# Altium PCB Module Board.PcbDoc (part 2 of 6)
Units mm, origin at the board's own origin, x right, y up, seen from the top; angles counter-clockwise.
Board outline 300 x 80 mm, 4 copper layers (Top Layer, GND1-Layer, GND2-Layer, Bottom Layer), stack 1.586 mm thick; 425 components, 248 nets, 1063 pads, 936 vias.
Unrouted connection lines stored in the file: 3.
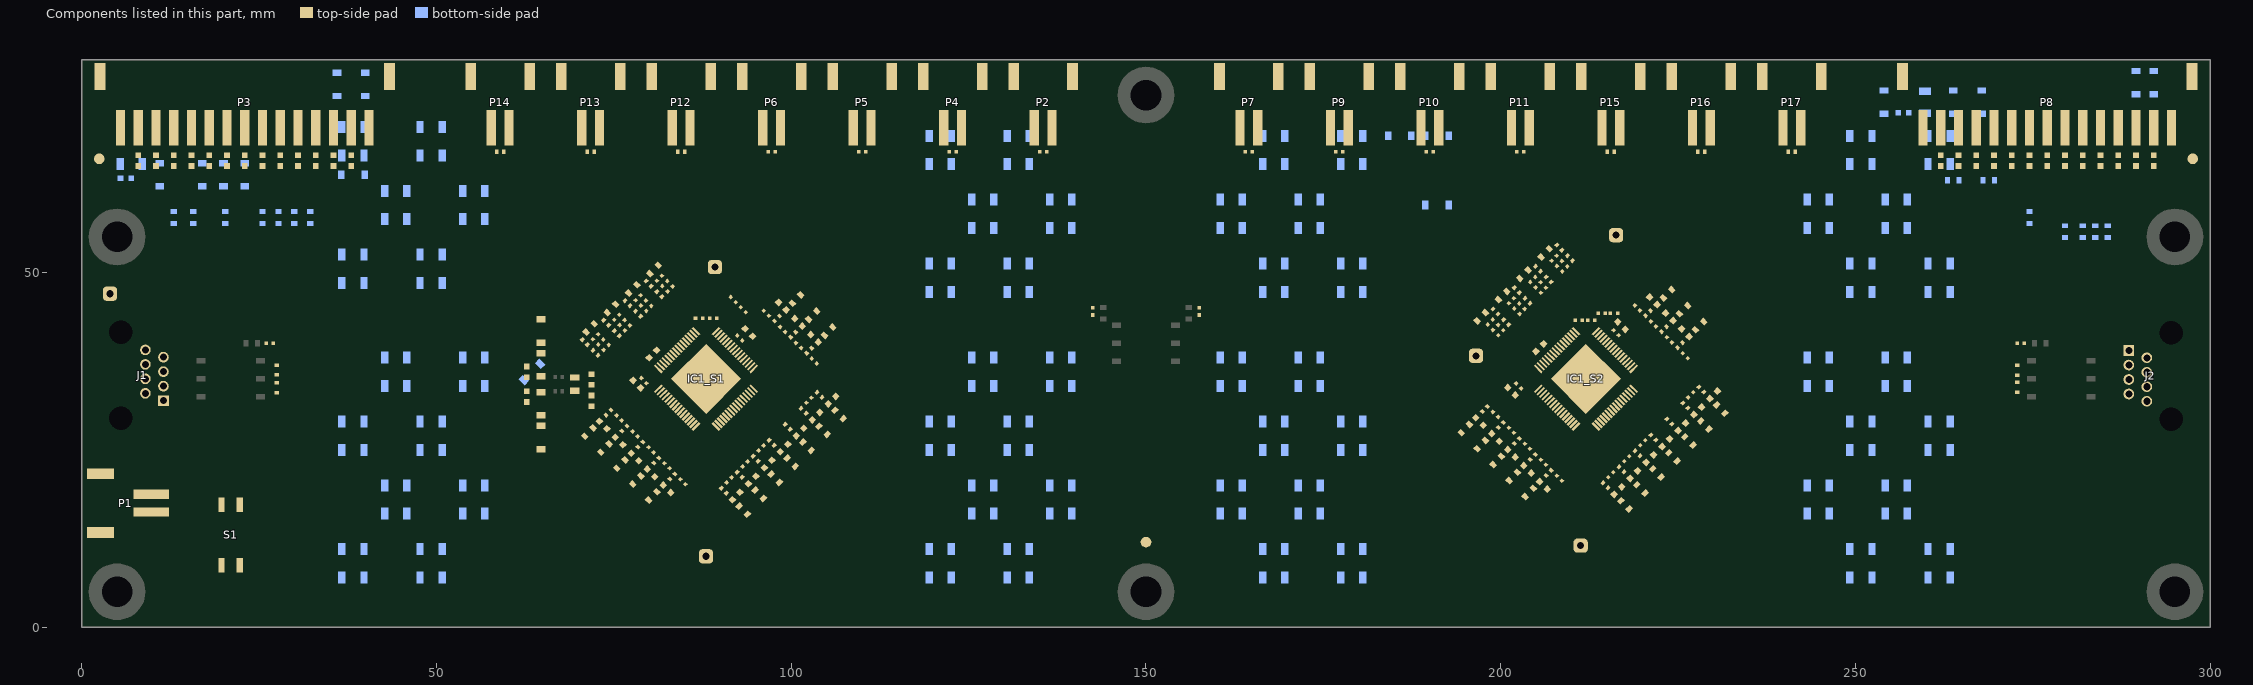
[diagram p4: the components of this part, seen from the top]

## Design rules (kind name [scope] priority, off if disabled: settings) (continued)
Clearance "Schematic Clearance Constraint_16" [InNet('NetC47_S1_2')] p149: gap=0.5 ignorepadtopadclearanceinfootprint=TRUE except(0.15: Arc-Text Arc-Hole Track-Text Track-Hole SMDPad-Text SMDPad-Hole THPad-Text THPad-Hole Via-Text Via-Hole Fill-Text Fill-Hole Poly-Text Poly-Hole Region-Text Region-Hole Text-Text Text-Hole)
Clearance "Schematic Clearance Constraint_15" [InNet('NetC49_S1_2')] p150: gap=0.5 ignorepadtopadclearanceinfootprint=TRUE except(0.15: Arc-Text Arc-Hole Track-Text Track-Hole SMDPad-Text SMDPad-Hole THPad-Text THPad-Hole Via-Text Via-Hole Fill-Text Fill-Hole Poly-Text Poly-Hole Region-Text Region-Hole Text-Text Text-Hole)
Clearance "Schematic Clearance Constraint_14" [InNet('NetC52_S1_2')] p151: gap=0.5 ignorepadtopadclearanceinfootprint=TRUE except(0.15: Arc-Text Arc-Hole Track-Text Track-Hole SMDPad-Text SMDPad-Hole THPad-Text THPad-Hole Via-Text Via-Hole Fill-Text Fill-Hole Poly-Text Poly-Hole Region-Text Region-Hole Text-Text Text-Hole)
Clearance "Schematic Clearance Constraint_13" [InNet('NetC55_S1_2')] p152: gap=0.5 ignorepadtopadclearanceinfootprint=TRUE except(0.15: Arc-Text Arc-Hole Track-Text Track-Hole SMDPad-Text SMDPad-Hole THPad-Text THPad-Hole Via-Text Via-Hole Fill-Text Fill-Hole Poly-Text Poly-Hole Region-Text Region-Hole Text-Text Text-Hole)
Clearance "Schematic Clearance Constraint_12" [InNet('NetC58_S1_2')] p153: gap=0.5 ignorepadtopadclearanceinfootprint=TRUE except(0.15: Arc-Text Arc-Hole Track-Text Track-Hole SMDPad-Text SMDPad-Hole THPad-Text THPad-Hole Via-Text Via-Hole Fill-Text Fill-Hole Poly-Text Poly-Hole Region-Text Region-Hole Text-Text Text-Hole)
Clearance "Schematic Clearance Constraint_11" [InNet('NetC63_S1_2')] p154: gap=0.5 ignorepadtopadclearanceinfootprint=TRUE except(0.15: Arc-Text Arc-Hole Track-Text Track-Hole SMDPad-Text SMDPad-Hole THPad-Text THPad-Hole Via-Text Via-Hole Fill-Text Fill-Hole Poly-Text Poly-Hole Region-Text Region-Hole Text-Text Text-Hole)
Clearance "Schematic Clearance Constraint_10" [InNet('NetR57_RB_C21_2')] p155: gap=0.5 ignorepadtopadclearanceinfootprint=TRUE except(0.15: Arc-Text Arc-Hole Track-Text Track-Hole SMDPad-Text SMDPad-Hole THPad-Text THPad-Hole Via-Text Via-Hole Fill-Text Fill-Hole Poly-Text Poly-Hole Region-Text Region-Hole Text-Text Text-Hole)
Clearance "Schematic Clearance Constraint_9" [InNet('NetR57_RB_C101_2')] p156: gap=0.5 ignorepadtopadclearanceinfootprint=TRUE except(0.15: Arc-Text Arc-Hole Track-Text Track-Hole SMDPad-Text SMDPad-Hole THPad-Text THPad-Hole Via-Text Via-Hole Fill-Text Fill-Hole Poly-Text Poly-Hole Region-Text Region-Hole Text-Text Text-Hole)
Clearance "Schematic Clearance Constraint_8" [InNet('NetR57_RB_C31_2')] p157: gap=0.5 ignorepadtopadclearanceinfootprint=TRUE except(0.15: Arc-Text Arc-Hole Track-Text Track-Hole SMDPad-Text SMDPad-Hole THPad-Text THPad-Hole Via-Text Via-Hole Fill-Text Fill-Hole Poly-Text Poly-Hole Region-Text Region-Hole Text-Text Text-Hole)
Clearance "Schematic Clearance Constraint_7" [InNet('NetR57_RB_C41_2')] p158: gap=0.5 ignorepadtopadclearanceinfootprint=TRUE except(0.15: Arc-Text Arc-Hole Track-Text Track-Hole SMDPad-Text SMDPad-Hole THPad-Text THPad-Hole Via-Text Via-Hole Fill-Text Fill-Hole Poly-Text Poly-Hole Region-Text Region-Hole Text-Text Text-Hole)
Clearance "Schematic Clearance Constraint_6" [InNet('NetR57_RB_C51_2')] p159: gap=0.5 ignorepadtopadclearanceinfootprint=TRUE except(0.15: Arc-Text Arc-Hole Track-Text Track-Hole SMDPad-Text SMDPad-Hole THPad-Text THPad-Hole Via-Text Via-Hole Fill-Text Fill-Hole Poly-Text Poly-Hole Region-Text Region-Hole Text-Text Text-Hole)
Clearance "Schematic Clearance Constraint_5" [InNet('NetR57_RB_C61_2')] p160: gap=0.5 ignorepadtopadclearanceinfootprint=TRUE except(0.15: Arc-Text Arc-Hole Track-Text Track-Hole SMDPad-Text SMDPad-Hole THPad-Text THPad-Hole Via-Text Via-Hole Fill-Text Fill-Hole Poly-Text Poly-Hole Region-Text Region-Hole Text-Text Text-Hole)
Clearance "Schematic Clearance Constraint_4" [InNet('NetR57_RB_C71_2')] p161: gap=0.5 ignorepadtopadclearanceinfootprint=TRUE except(0.15: Arc-Text Arc-Hole Track-Text Track-Hole SMDPad-Text SMDPad-Hole THPad-Text THPad-Hole Via-Text Via-Hole Fill-Text Fill-Hole Poly-Text Poly-Hole Region-Text Region-Hole Text-Text Text-Hole)
Clearance "Schematic Clearance Constraint_3" [InNet('NetR57_RB_C81_2')] p162: gap=0.5 ignorepadtopadclearanceinfootprint=TRUE except(0.15: Arc-Text Arc-Hole Track-Text Track-Hole SMDPad-Text SMDPad-Hole THPad-Text THPad-Hole Via-Text Via-Hole Fill-Text Fill-Hole Poly-Text Poly-Hole Region-Text Region-Hole Text-Text Text-Hole)
Clearance "Schematic Clearance Constraint_2" [InNet('NetR57_RB_C91_2')] p163: gap=0.5 ignorepadtopadclearanceinfootprint=TRUE except(0.15: Arc-Text Arc-Hole Track-Text Track-Hole SMDPad-Text SMDPad-Hole THPad-Text THPad-Hole Via-Text Via-Hole Fill-Text Fill-Hole Poly-Text Poly-Hole Region-Text Region-Hole Text-Text Text-Hole)
Clearance "Schematic Clearance Constraint_1" [InNet('CB_1_S2')] p164: gap=0.5 ignorepadtopadclearanceinfootprint=TRUE except(0.15: Arc-Text Arc-Hole Track-Text Track-Hole SMDPad-Text SMDPad-Hole THPad-Text THPad-Hole Via-Text Via-Hole Fill-Text Fill-Hole Poly-Text Poly-Hole Region-Text Region-Hole Text-Text Text-Hole)
Clearance [All] p165: gap=0.15 ignorepadtopadclearanceinfootprint=TRUE
ComponentClearance ComponentClearance_netTie0.4 [HasFootprint('NETTIE_0.4mm')] p1: gap=0.15 collisioncheckmode=3 verticalgap=0.15 showdistances=FALSE
ComponentClearance ComponentClearance_netTie0.2 [HasFootprint('NETTIE_0.2mm')] p2: gap=0.15 collisioncheckmode=3 verticalgap=0.15 showdistances=FALSE
ComponentClearance ComponentClearance_0402 [HasFootprint('FP-RT0402-0_35-MFG')] p3: gap=0.15 collisioncheckmode=3 verticalgap=0.15 showdistances=FALSE
ComponentClearance ComponentClearance_0402cap [HasFootprint('WCAP-CSGP_0402_L1W0.5H0.5')] p4: gap=0.15 collisioncheckmode=3 verticalgap=0.15 showdistances=FALSE
ComponentClearance ComponentClearance_default [All] p5: gap=0.25 collisioncheckmode=3 verticalgap=0.25 showdistances=FALSE
DiffPairsRouting USB90 [InDifferentialPairClass('USB90')] p1: maxlimit=0.15 minlimit=0.15 mostfreqgap=0.15 toplayer_minwidth=0.27 toplayer_maxwidth=0.27 toplayer_prefwidth=0.27 bottomlayer_minwidth=0.27 bottomlayer_maxwidth=0.27 bottomlayer_prefwidth=0.27 impedanceprofiledriven=TRUE impedanceprofileid={DC1DE9DE-C0C6-4966-BB51-316A41783ADE} impedanceprofilevalue=90.000000 maxuncoupledlength=12.7
DiffPairsRouting TPL100 [InDifferentialPairClass('TPL100')] p2: maxlimit=0.15 minlimit=0.15 mostfreqgap=0.15 toplayer_minwidth=0.2 toplayer_maxwidth=0.2 toplayer_prefwidth=0.2 bottomlayer_minwidth=0.2 bottomlayer_maxwidth=0.2 bottomlayer_prefwidth=0.2 impedanceprofiledriven=TRUE impedanceprofileid={703E7EA8-AA8D-435B-A468-5B85F633AE72} impedanceprofilevalue=100.000000 maxuncoupledlength=12.7
DiffPairsRouting CAN120 [InDifferentialPairClass('CAN120')] p3: maxlimit=0.3 minlimit=0.3 mostfreqgap=0.3 toplayer_minwidth=0.19 toplayer_maxwidth=0.19 toplayer_prefwidth=0.19 bottomlayer_minwidth=0.19 bottomlayer_maxwidth=0.19 bottomlayer_prefwidth=0.19 impedanceprofiledriven=TRUE impedanceprofileid={871B5821-40E8-4773-8F16-608F7B2A7119} impedanceprofilevalue=120.000000 maxuncoupledlength=12.7
Height [All] p1: minheight=0 maxheight=999 prefheight=1
HoleSize HoleSize-PTH [All] p1: absolutevalues=TRUE maxlimit=8 minlimit=0.25 maxpercent=80.000 minpercent=20.000
HoleToHoleClearance [All] p1: gap=0.35 allowstackedmicrovias=TRUE
MatchedLengths DiffPair_USB90MatchedLengths [InDifferentialPairClass('USB90')] p1: tolerance=25.4 checknetsindiffpair=FALSE checkdiffpairvsdiffpair=TRUE checkxsignals=TRUE checkothers=TRUE
MatchedLengths DiffPair_TPL100MatchedLengths [InDifferentialPairClass('TPL100')] p2: tolerance=25.4 checknetsindiffpair=TRUE checkdiffpairvsdiffpair=FALSE checkxsignals=FALSE checkothers=FALSE
MatchedLengths DiffPair_CAN120MatchedLengths [InDifferentialPairClass('CAN120')] p3: tolerance=25.4 checknetsindiffpair=FALSE checkdiffpairvsdiffpair=TRUE checkxsignals=TRUE checkothers=TRUE
MinimumAnnularRing "MinimumAnnularRing - Via" [IsVia] p1: minimumring=0.07
MinimumAnnularRing "MinimumAnnularRing - PTH" [Not IsVia] p2: minimumring=0.2
MinimumSolderMaskSliver [All] p1: minsoldermaskwidth=0.1
PlaneClearance PlaneClearance-IPI [All] p1: clearance=0.25
PlaneConnect [All] p1: planeconnectstyle=Relief reliefexpansion=0.175 reliefentries=4 reliefconductorwidth=0.3 reliefairgap=0.25
PolygonConnect PolygonConnect-xTW [InNet('+12')] p1: thpad.connectstyle=Relief thpad.reliefconductorwidth=0.5 thpad.reliefentries=4 thpad.polygonreliefangle="90 Angle" thpad.airgapwidth=0.2 smdpad.connectstyle=Relief smdpad.reliefconductorwidth=0.5 smdpad.reliefentries=4 smdpad.polygonreliefangle="90 Angle" smdpad.airgapwidth=0.2 via.connectstyle=Direct via.reliefconductorwidth=0.2 via.reliefentries=4 via.polygonreliefangle="90 Angle" via.airgapwidth=0.2
PolygonConnect PolygonConnect-xTW_1 [All] p2: thpad.connectstyle=Relief thpad.reliefconductorwidth=0.2 thpad.reliefentries=4 thpad.polygonreliefangle="90 Angle" thpad.airgapwidth=0.2 smdpad.connectstyle=Relief smdpad.reliefconductorwidth=0.2 smdpad.reliefentries=4 smdpad.polygonreliefangle="90 Angle" smdpad.airgapwidth=0.2 via.connectstyle=Direct via.reliefconductorwidth=0.2 via.reliefentries=4 via.polygonreliefangle="90 Angle" via.airgapwidth=0.2
RoomDefinition MC33771C_S2_CLEARANCE [InComponent('IC1_S2')] p1: confinementstyle=ConfineIn formatcopy=TRUE lockcomponents=TRUE outline 224.475,36.325 214.175,46.625 209.15,46.625 200.525,38 200.525,32.9 209.3,24.125 214.35,24.125 224.675,34.45 224.7,34.45 224.7,36.15 224.525,36.325
RoomDefinition S2 [InComponentClass('S2')] p2: confinementstyle=ConfineIn formatcopy=TRUE lockcomponents=FALSE outline 150,0 300,0 300,80 150,80
RoomDefinition MC33771C_S1_CLEARANCE [InComponent('IC1_S1')] p3: confinementstyle=ConfineIn formatcopy=TRUE lockcomponents=TRUE outline 75.525,33.675 85.825,23.375 90.85,23.375 99.475,32 99.475,37.1 90.7,45.875 85.65,45.875 75.325,35.55 75.3,35.55 75.3,33.85 75.475,33.675
RoomDefinition S1 [InComponentClass('S1')] p4: confinementstyle=ConfineIn formatcopy=TRUE lockcomponents=FALSE outline 150,80 0,80 0,-0.077 150,-0.077
RoutingCorners [All] p1: cornerstyle=45-Degree minsetback=2.5 maxsetback=2.5
RoutingVias [All] p1: holewidth=0.3 width=0.7 viastyle="Through Hole" minholewidth=0.3 minwidth=0.7 maxholewidth=0.3 maxwidth=0.7 useviatemplates=TRUE viatemplateguid#1={0CEBF049-3292-49C3-AD05-9A2C428BFCBA} viatemplatename#1=v70h30
SMDEntry [All] p1: side=TRUE corner=TRUE anyangle=TRUE
SMDNeckDown SMDNeckDown_1 [All] p1: percent=120.000
SMDToCorner [All] p1: distance=0
SilkToSilkClearance [All] p1: silktosilkclearance=0
SilkToSolderMaskClearance SilkscreenOverComponentPads [IsPad] p1: minsilkscreentomaskgap=0.15 clearancetoexposedcopper=TRUE
SolderMaskExpansion [All] p1: expansion=0 istentingtop=FALSE
SupplyNets "Schematic Supply Nets_1" [InNet('GND_S1')] p1: voltage=0.000
SupplyNets "Schematic Supply Nets" [InNet('GND_S2')] p2: voltage=0.000
UnRoutedNet [All] p1: checkbadconnections=TRUE
Width [All] p1: maxlimit=2 minlimit=0.2 preferedwidth=0.4
18 further rules are at their usual default settings.

## Classes and differential pairs
net class S2_GPIO[4..6]: S2_GPIO4 S2_GPIO5 S2_GPIO6
net class S1_GPIO[4..6]: S1_GPIO4 S1_GPIO5 S1_GPIO6
channel class BalancingNetwork: RB_C11 RB_C12 RB_C21 RB_C22 RB_C31 RB_C32 RB_C41 RB_C42 RB_C51 RB_C52 RB_C61 RB_C62 RB_C71 RB_C72 RB_C81 RB_C82 RB_C91 RB_C92 RB_C101 RB_C102 RB_C121 RB_C122 RB_C1111 RB_C1112 RB_NA11 RB_NA12 RB_NA21 RB_NA22
component class RB_NA22: R57_RB_NA22 R58_RB_NA22 R59_RB_NA22 R60_RB_NA22
component class RB_NA21: R57_RB_NA21 R58_RB_NA21 R59_RB_NA21 R60_RB_NA21
component class RB_NA12: R57_RB_NA12 R58_RB_NA12 R59_RB_NA12 R60_RB_NA12
component class RB_NA11: R57_RB_NA11 R58_RB_NA11 R59_RB_NA11 R60_RB_NA11
component class RB_C1112: R57_RB_C1112 R58_RB_C1112 R59_RB_C1112 R60_RB_C1112
component class RB_C1111: R57_RB_C1111 R58_RB_C1111 R59_RB_C1111 R60_RB_C1111
component class RB_C122: R57_RB_C122 R58_RB_C122 R59_RB_C122 R60_RB_C122
component class RB_C121: R57_RB_C121 R58_RB_C121 R59_RB_C121 R60_RB_C121
component class RB_C102: R57_RB_C102 R58_RB_C102 R59_RB_C102 R60_RB_C102
component class RB_C101: R57_RB_C101 R58_RB_C101 R59_RB_C101 R60_RB_C101
component class RB_C92: R57_RB_C92 R58_RB_C92 R59_RB_C92 R60_RB_C92
component class RB_C91: R57_RB_C91 R58_RB_C91 R59_RB_C91 R60_RB_C91
component class RB_C82: R57_RB_C82 R58_RB_C82 R59_RB_C82 R60_RB_C82
component class RB_C81: R57_RB_C81 R58_RB_C81 R59_RB_C81 R60_RB_C81
component class RB_C72: R57_RB_C72 R58_RB_C72 R59_RB_C72 R60_RB_C72
component class RB_C71: R57_RB_C71 R58_RB_C71 R59_RB_C71 R60_RB_C71
component class RB_C62: R57_RB_C62 R58_RB_C62 R59_RB_C62 R60_RB_C62
component class RB_C61: R57_RB_C61 R58_RB_C61 R59_RB_C61 R60_RB_C61
component class RB_C52: R57_RB_C52 R58_RB_C52 R59_RB_C52 R60_RB_C52
component class RB_C51: R57_RB_C51 R58_RB_C51 R59_RB_C51 R60_RB_C51
component class RB_C42: R57_RB_C42 R58_RB_C42 R59_RB_C42 R60_RB_C42
component class RB_C41: R57_RB_C41 R58_RB_C41 R59_RB_C41 R60_RB_C41
component class RB_C32: R57_RB_C32 R58_RB_C32 R59_RB_C32 R60_RB_C32
component class RB_C31: R57_RB_C31 R58_RB_C31 R59_RB_C31 R60_RB_C31
component class RB_C22: R57_RB_C22 R58_RB_C22 R59_RB_C22 R60_RB_C22
component class RB_C21: R57_RB_C21 R58_RB_C21 R59_RB_C21 R60_RB_C21
component class RB_C12: R57_RB_C12 R58_RB_C12 R59_RB_C12 R60_RB_C12
component class RB_C11: R57_RB_C11 R58_RB_C11 R59_RB_C11 R60_RB_C11
differential pair class TPL100: RDTX_IN_S1 RDTX_IN_S2 RDTX_OUT_S1 RDTX_OUT_S2 TPL_IN TPL_OUT
net class S2_CELL[1..12]: S2_CELL1 S2_CELL2 S2_CELL3 S2_CELL4 S2_CELL5 S2_CELL6 S2_CELL7 S2_CELL8 S2_CELL9 S2_CELL10 S2_CELL11 S2_CELL12
net class S1_CELL[1..12]: S1_CELL1 S1_CELL2 S1_CELL3 S1_CELL4 S1_CELL5 S1_CELL6 S1_CELL7 S1_CELL8 S1_CELL9 S1_CELL10 S1_CELL11 S1_CELL12
net class S2_NTC[0..3]: S2_NTC0 S2_NTC1 S2_NTC2 S2_NTC3
net class S1_NTC[0..3]: S1_NTC0 S1_NTC1 S1_NTC2 S1_NTC3
channel class Slave: S1 S2
component class S2: C1_S2 C2_S2 C3_S2 C4_S2 C5_S2 C6_S2 C7_S2 C8_S2 C9_S2 C10_S2 C11_S2 C12_S2 C13_S2 C14_S2 C15_S2 C16_S2 C17_S2 C18_S2 C19_S2 C20_S2 C21_S2 C22_S2 C23_S2 C24_S2 C25_S2 C26_S2 C27_S2 C28_S2 C29_S2 C30_S2 C31_S2 C32_S2 C33_S2 C34_S2 C35_S2 C36_S2 C37_S2 C38_S2 C39_S2 C40_S2 C41_S2 C42_S2 C43_S2 C44_S2 C45_S2 C46_S2 C47_S2 C48_S2 C49_S2 C50_S2 C51_S2 C52_S2 C53_S2 C54_S2 C55_S2 C56_S2 C57_S2 C58_S2 C59_S2 C60_S2 C61_S2 C62_S2 C63_S2 D1_S2 D2_S2 D3_S2 D4_S2 D5_S2 D6_S2 D7_S2 D8_S2 IC1_S2 R1_S2 R2_S2 R3_S2 R4_S2 R5_S2 R6_S2 R7_S2 R8_S2 R9_S2 R10_S2 R11_S2 R12_S2 R13_S2 R14_S2 R15_S2 R16_S2 R17_S2 R18_S2 R19_S2 R20_S2 R21_S2 R22_S2 R23_S2 R24_S2 R25_S2 R26_S2 R27_S2 R28_S2 R29_S2 R30_S2 R31_S2 R32_S2 R33_S2 R34_S2 R35_S2 R36_S2 R37_S2 R38_S2 R39_S2 R40_S2 R41_S2 R42_S2 R43_S2 R44_S2 R45_S2 R46_S2 R47_S2 R48_S2 R49_S2 R50_S2 R61_S2 R62_S2 R63_S2 TP1_S2 TP2_S2 TP3_S2
component class S1: C1_S1 C2_S1 C3_S1 C4_S1 C5_S1 C6_S1 C7_S1 C8_S1 C9_S1 C10_S1 C11_S1 C12_S1 C13_S1 C14_S1 C15_S1 C16_S1 C17_S1 C18_S1 C19_S1 C20_S1 C21_S1 C22_S1 C23_S1 C24_S1 C25_S1 C26_S1 C27_S1 C28_S1 C29_S1 C30_S1 C31_S1 C32_S1 C33_S1 C34_S1 C35_S1 C36_S1 C37_S1 C38_S1 C39_S1 C40_S1 C41_S1 C42_S1 C43_S1 C44_S1 C45_S1 C46_S1 C47_S1 C48_S1 C49_S1 C50_S1 C51_S1 C52_S1 C53_S1 C54_S1 C55_S1 C56_S1 C57_S1 C58_S1 C59_S1 C60_S1 C61_S1 C62_S1 C63_S1 D1_S1 D2_S1 D3_S1 D4_S1 D5_S1 D6_S1 D7_S1 D8_S1 IC1_S1 R1_S1 R2_S1 R3_S1 R4_S1 R5_S1 R6_S1 R7_S1 R8_S1 R9_S1 R10_S1 R11_S1 R12_S1 R13_S1 R14_S1 R15_S1 R16_S1 R17_S1 R18_S1 R19_S1 R20_S1 R21_S1 R22_S1 R23_S1 R24_S1 R25_S1 R26_S1 R27_S1 R28_S1 R29_S1 R30_S1 R31_S1 R32_S1 R33_S1 R34_S1 R35_S1 R36_S1 R37_S1 R38_S1 R39_S1 R40_S1 R41_S1 R42_S1 R43_S1 R44_S1 R45_S1 R46_S1 R47_S1 R48_S1 R49_S1 R50_S1 R61_S1 R62_S1 R63_S1 TP1_S1 TP2_S1 TP3_S1
differential pair S1_ISENSE: +S1_ISENSE_P -S1_ISENSE_N
differential pair ISENSE: +ISENSE_P -ISENSE_N
differential pair RDTX_OUT_S2: +RDTX_OUT_S2_P -RDTX_OUT_S2_N
differential pair RDTX_OUT_S1: +RDTX_OUT_S1_P -RDTX_OUT_S1_N
differential pair RDTX_IN_S2: +RDTX_IN_S2_P -RDTX_IN_S2_N
differential pair RDTX_IN_S1: +RDTX_IN_S1_P -RDTX_IN_S1_N
differential pair TPL_OUT: +TPL_OUT_P -TPL_OUT_N
differential pair TPL_IN: +TPL_IN_P -TPL_IN_N

## Components (designator, comment, footprint, x,y, rotation, side; value= is the part's Value field where it differs from the comment)
*1 "GTT standard Fiducial 1.5" "Fiducial 1.5mm" 2.5,66 r0 top locked
*3 "GTT standard Fiducial 1.5" "Fiducial 1.5mm" 150,12 r0 top locked
*5 "GTT standard Fiducial 1.5" "Fiducial 1.5mm" 297.5,66 r0 top locked
C1_S1 "CAP 0603 47nF X7R" WCAP-CSGP_0603_L1.6W0.8H0.8_Reflow 8,65.75 r90 top value=47nF (schematic designator C1)
C1_S2 "CAP 0603 47nF X7R" WCAP-CSGP_0603_L1.6W0.8H0.8_Reflow 262,65.75 r90 top value=47nF (schematic designator C1)
C2_S1 "CAP 0603 100nF X7R" WCAP-CSGP_0603_L1.6W0.8H0.8_Reflow 73.5,28.5 r135 top value=100nF (schematic designator C2)
C2_S2 "CAP 0603 100nF X7R" WCAP-CSGP_0603_L1.6W0.8H0.8_Reflow 197,29 r135 top value=100nF (schematic designator C2)
C3_S1 "CAP 0402 1nF X7R" WCAP-CSGP_0402_L1W0.5H0.5 81.427,49.177 r45 top value=1nF (schematic designator C3)
C3_S2 "CAP 0402 1nF X7R" WCAP-CSGP_0402_L1W0.5H0.5 207.5,52 r225 top value=1nF (schematic designator C3)
C4_S1 "CAP 0402 10nF X7R" WCAP-CSGP_0402_L1W0.5H0.5 75.75,29.5 r135 top value=10nF (schematic designator C4)
C4_S2 "CAP 0402 10nF X7R" WCAP-CSGP_0402_L1W0.5H0.5 199.25,30 r135 top value=10nF (schematic designator C4)
C5_S1 "CAP 0603 47nF X7R" WCAP-CSGP_0603_L1.6W0.8H0.8_Reflow 10.5,65.75 r90 top value=47nF (schematic designator C5)
C5_S2 "CAP 0603 47nF X7R" WCAP-CSGP_0603_L1.6W0.8H0.8_Reflow 264.5,65.75 r90 top value=47nF (schematic designator C5)
C6_S1 "CAP 0603 100nF X7R" WCAP-CSGP_0603_L1.6W0.8H0.8_Reflow 75.75,26.25 r135 top value=100nF (schematic designator C6)
C6_S2 "CAP 0603 100nF X7R" WCAP-CSGP_0603_L1.6W0.8H0.8_Reflow 199.25,26.75 r135 top value=100nF (schematic designator C6)
C7_S1 "CAP 0402 1nF X7R" WCAP-CSGP_0402_L1W0.5H0.5 135.5,67 r0 top value=1nF (schematic designator C7)
C7_S2 "CAP 0402 1nF X7R" WCAP-CSGP_0402_L1W0.5H0.5 164.5,67 r0 top value=1nF (schematic designator C7)
C8_S1 "CAP 0402 1nF X7R" WCAP-CSGP_0402_L1W0.5H0.5 82.177,48.427 r225 top value=1nF (schematic designator C8)
C8_S2 "CAP 0402 1nF X7R" WCAP-CSGP_0402_L1W0.5H0.5 208.25,51.25 r45 top value=1nF (schematic designator C8)
C9_S1 "CAP 0402 1nF X7R" WCAP-CSGP_0402_L1W0.5H0.5 82.927,47.677 r225 top value=1nF (schematic designator C9)
C9_S2 "CAP 0402 1nF X7R" WCAP-CSGP_0402_L1W0.5H0.5 209,50.5 r45 top value=1nF (schematic designator C9)
C10_S1 "CAP 0402 10nF X7R" WCAP-CSGP_0402_L1W0.5H0.5 78,27.25 r135 top value=10nF (schematic designator C10)
C10_S2 "CAP 0402 10nF X7R" WCAP-CSGP_0402_L1W0.5H0.5 201.5,27.75 r135 top value=10nF (schematic designator C10)
C11_S1 "CAP 0603 220nF X7R" WCAP-CSGP_0603_L1.6W0.8H0.8_Reflow 78.25,34.25 r315 top value=220nF (schematic designator C11)
C11_S2 "CAP 0603 220nF X7R" WCAP-CSGP_0603_L1.6W0.8H0.8_Reflow 201.5,33.25 r315 top value=220nF (schematic designator C11)
C12_S1 "CAP 0402 1nF X7R" WCAP-CSGP_0402_L1W0.5H0.5 79.25,34.75 r315 top value=1nF (schematic designator C12)
C12_S2 "CAP 0402 1nF X7R" WCAP-CSGP_0402_L1W0.5H0.5 202.5,34 r315 top value=1nF (schematic designator C12)
C13_S1 "CAP 0603 47nF X7R" WCAP-CSGP_0603_L1.6W0.8H0.8_Reflow 13,65.75 r90 top value=47nF (schematic designator C13)
C13_S2 "CAP 0603 47nF X7R" WCAP-CSGP_0603_L1.6W0.8H0.8_Reflow 267,65.75 r90 top value=47nF (schematic designator C13)
C14_S1 "CAP 0603 100nF X7R" WCAP-CSGP_0603_L1.6W0.8H0.8_Reflow 78,24 r135 top value=100nF (schematic designator C14)
C14_S2 "CAP 0603 100nF X7R" WCAP-CSGP_0603_L1.6W0.8H0.8_Reflow 201.5,24.5 r135 top value=100nF (schematic designator C14)
C15_S1 "CAP 0402 10nF X7R" WCAP-CSGP_0402_L1W0.5H0.5 80.25,25 r135 top value=10nF (schematic designator C15)
C15_S2 "CAP 0402 10nF X7R" WCAP-CSGP_0402_L1W0.5H0.5 203.75,25.5 r135 top value=10nF (schematic designator C15)
C16_S1 "CAP 0402 220pF X7R" WCAP-CSGP_0402_L1W0.5H0.5 92.75,40.75 r135 top value=220pF (schematic designator C16)
C16_S2 "CAP 0402 220pF X7R" WCAP-CSGP_0402_L1W0.5H0.5 216.25,41.5 r315 top value=220pF (schematic designator C16)
C17_S1 "CAP 0603 2.2uF X7R" WCAP-CSGP_0603_L1.6W0.8H0.8_Reflow 94.033,41.533 r135 top value=2.2uF (schematic designator C17)
C17_S2 "CAP 0603 2.2uF X7R" WCAP-CSGP_0603_L1.6W0.8H0.8_Reflow 217,42.5 r315 top value=2.2uF (schematic designator C17)
C18_S1 "CAP 0402 1nF X7R" WCAP-CSGP_0402_L1W0.5H0.5 78.427,46.427 r45 top value=1nF (schematic designator C18)
C18_S2 "CAP 0402 1nF X7R" WCAP-CSGP_0402_L1W0.5H0.5 204.5,49 r225 top value=1nF (schematic designator C18)
C19_S1 "CAP 0603 47nF X7R" WCAP-CSGP_0603_L1.6W0.8H0.8_Reflow 15.5,65.75 r90 top value=47nF (schematic designator C19)
C19_S2 "CAP 0603 47nF X7R" WCAP-CSGP_0603_L1.6W0.8H0.8_Reflow 269.5,65.75 r90 top value=47nF (schematic designator C19)
C20_S1 "CAP 0603 100nF X7R" WCAP-CSGP_0603_L1.6W0.8H0.8_Reflow 80.25,21.75 r135 top value=100nF (schematic designator C20)
C20_S2 "CAP 0603 100nF X7R" WCAP-CSGP_0603_L1.6W0.8H0.8_Reflow 203.75,22.25 r135 top value=100nF (schematic designator C20)
C21_S1 "CAP 0603 47nF X7R" WCAP-CSGP_0603_L1.6W0.8H0.8_Reflow 80.5,38.5 r225 top value=47nF (schematic designator C21)
C21_S2 "CAP 0603 47nF X7R" WCAP-CSGP_0603_L1.6W0.8H0.8_Reflow 205.486,39.4 r225 top value=47nF (schematic designator C21)
C22_S1 "CAP 0402 10nF X7R" WCAP-CSGP_0402_L1W0.5H0.5 82.5,22.75 r135 top value=10nF (schematic designator C22)
C22_S2 "CAP 0402 10nF X7R" WCAP-CSGP_0402_L1W0.5H0.5 206,23.25 r135 top value=10nF (schematic designator C22)
C23_S1 "CAP 0402 1nF X7R" WCAP-CSGP_0402_L1W0.5H0.5 122.75,67 r0 top value=1nF (schematic designator C23)
C23_S2 "CAP 0402 1nF X7R" WCAP-CSGP_0402_L1W0.5H0.5 177.25,67 r0 top value=1nF (schematic designator C23)
C24_S1 "CAP 0402 1nF X7R" WCAP-CSGP_0402_L1W0.5H0.5 79.177,45.677 r225 top value=1nF (schematic designator C24)
C24_S2 "CAP 0402 1nF X7R" WCAP-CSGP_0402_L1W0.5H0.5 205.25,48.25 r45 top value=1nF (schematic designator C24)
C25_S1 "CAP 0402 1nF X7R" WCAP-CSGP_0402_L1W0.5H0.5 79.927,44.927 r225 top value=1nF (schematic designator C25)
C25_S2 "CAP 0402 1nF X7R" WCAP-CSGP_0402_L1W0.5H0.5 206,47.5 r45 top value=1nF (schematic designator C25)
C26_S1 "CAP 0603 47nF X7R" WCAP-CSGP_0603_L1.6W0.8H0.8_Reflow 18,65.75 r90 top value=47nF (schematic designator C26)
C26_S2 "CAP 0603 47nF X7R" WCAP-CSGP_0603_L1.6W0.8H0.8_Reflow 272,65.75 r90 top value=47nF (schematic designator C26)
C27_S1 "CAP 0603 100nF X7R" WCAP-CSGP_0603_L1.6W0.8H0.8_Reflow 82.5,19.5 r135 top value=100nF (schematic designator C27)
C27_S2 "CAP 0603 100nF X7R" WCAP-CSGP_0603_L1.6W0.8H0.8_Reflow 206,20 r135 top value=100nF (schematic designator C27)
C28_S1 "CAP 0402 10nF X7R" WCAP-CSGP_0402_L1W0.5H0.5 84.75,20.5 r135 top value=10nF (schematic designator C28)
C28_S2 "CAP 0402 10nF X7R" WCAP-CSGP_0402_L1W0.5H0.5 208.25,21 r135 top value=10nF (schematic designator C28)
C29_S1 "CAP 0402 1nF X7R" WCAP-CSGP_0402_L1W0.5H0.5 75.427,43.677 r45 top value=1nF (schematic designator C29)
C29_S2 "CAP 0402 1nF X7R" WCAP-CSGP_0402_L1W0.5H0.5 201.5,46 r225 top value=1nF (schematic designator C29)
C30_S1 "CAP 0603 47nF X7R" WCAP-CSGP_0603_L1.6W0.8H0.8_Reflow 20.5,65.75 r90 top value=47nF (schematic designator C30)
C30_S2 "CAP 0603 47nF X7R" WCAP-CSGP_0603_L1.6W0.8H0.8_Reflow 274.5,65.75 r90 top value=47nF (schematic designator C30)
C31_S1 "CAP 0603 100nF X7R" WCAP-CSGP_0603_L1.6W0.8H0.8_Reflow 92.25,18.5 r225 top value=100nF (schematic designator C31)
C31_S2 "CAP 0603 100nF X7R" WCAP-CSGP_0603_L1.6W0.8H0.8_Reflow 216.5,19.25 r225 top value=100nF (schematic designator C31)
C32_S1 "CAP 0402 10nF X7R" WCAP-CSGP_0402_L1W0.5H0.5 91.25,20.75 r225 top value=10nF (schematic designator C32)
C32_S2 "CAP 0402 10nF X7R" WCAP-CSGP_0402_L1W0.5H0.5 215.5,21.5 r225 top value=10nF (schematic designator C32)
C33_S1 "CAP 0402 1nF X7R" WCAP-CSGP_0402_L1W0.5H0.5 110,67 r0 top value=1nF (schematic designator C33)
C33_S2 "CAP 0402 1nF X7R" WCAP-CSGP_0402_L1W0.5H0.5 190,67 r0 top value=1nF (schematic designator C33)
C34_S1 "CAP 0402 1nF X7R" WCAP-CSGP_0402_L1W0.5H0.5 76.177,42.927 r225 top value=1nF (schematic designator C34)
C34_S2 "CAP 0402 1nF X7R" WCAP-CSGP_0402_L1W0.5H0.5 202.25,45.25 r45 top value=1nF (schematic designator C34)
C35_S1 "CAP 0402 1nF X7R" WCAP-CSGP_0402_L1W0.5H0.5 76.927,42.177 r225 top value=1nF (schematic designator C35)
C35_S2 "CAP 0402 1nF X7R" WCAP-CSGP_0402_L1W0.5H0.5 203,44.5 r45 top value=1nF (schematic designator C35)
C36_S1 "CAP 0603 47nF X7R" WCAP-CSGP_0603_L1.6W0.8H0.8_Reflow 23,65.75 r90 top value=47nF (schematic designator C36)
C36_S2 "CAP 0603 47nF X7R" WCAP-CSGP_0603_L1.6W0.8H0.8_Reflow 277,65.75 r90 top value=47nF (schematic designator C36)
C37_S1 "CAP 0603 100nF X7R" WCAP-CSGP_0603_L1.6W0.8H0.8_Reflow 94.5,20.75 r225 top value=100nF (schematic designator C37)
C37_S2 "CAP 0603 100nF X7R" WCAP-CSGP_0603_L1.6W0.8H0.8_Reflow 218.75,21.5 r225 top value=100nF (schematic designator C37)
C38_S1 "CAP 0402 10nF X7R" WCAP-CSGP_0402_L1W0.5H0.5 93.5,23 r225 top value=10nF (schematic designator C38)
C38_S2 "CAP 0402 10nF X7R" WCAP-CSGP_0402_L1W0.5H0.5 217.75,23.75 r225 top value=10nF (schematic designator C38)
C39_S1 "CAP 0603 47nF X7R" WCAP-CSGP_0603_L1.6W0.8H0.8_Reflow 25.5,65.75 r90 top value=47nF (schematic designator C39)
C39_S2 "CAP 0603 47nF X7R" WCAP-CSGP_0603_L1.6W0.8H0.8_Reflow 279.5,65.75 r90 top value=47nF (schematic designator C39)
C40_S1 "CAP 0603 100nF X7R" WCAP-CSGP_0603_L1.6W0.8H0.8_Reflow 96.75,23 r225 top value=100nF (schematic designator C40)
C40_S2 "CAP 0603 100nF X7R" WCAP-CSGP_0603_L1.6W0.8H0.8_Reflow 221,23.75 r225 top value=100nF (schematic designator C40)
C41_S1 "CAP 0402 1nF X7R" WCAP-CSGP_0402_L1W0.5H0.5 72.427,40.927 r45 top value=1nF (schematic designator C41)
C41_S2 "CAP 0402 1nF X7R" WCAP-CSGP_0402_L1W0.5H0.5 198.5,43 r225 top value=1nF (schematic designator C41)
C42_S1 "CAP 0402 10nF X7R" WCAP-CSGP_0402_L1W0.5H0.5 95.75,25.25 r225 top value=10nF (schematic designator C42)
C42_S2 "CAP 0402 10nF X7R" WCAP-CSGP_0402_L1W0.5H0.5 220,26 r225 top value=10nF (schematic designator C42)
C43_S1 "CAP 0603 100nF X7R" WCAP-CSGP_0603_L1.6W0.8H0.8_Reflow 99,25.25 r225 top value=100nF (schematic designator C43)
C43_S2 "CAP 0603 100nF X7R" WCAP-CSGP_0603_L1.6W0.8H0.8_Reflow 223.25,26 r225 top value=100nF (schematic designator C43)
C44_S1 "CAP 0402 1nF X7R" WCAP-CSGP_0402_L1W0.5H0.5 97.25,67 r0 top value=1nF (schematic designator C44)
C44_S2 "CAP 0402 1nF X7R" WCAP-CSGP_0402_L1W0.5H0.5 202.75,67 r0 top value=1nF (schematic designator C44)
C45_S1 "CAP 0402 1nF X7R" WCAP-CSGP_0402_L1W0.5H0.5 73.177,40.177 r225 top value=1nF (schematic designator C45)
C45_S2 "CAP 0402 1nF X7R" WCAP-CSGP_0402_L1W0.5H0.5 199.25,42.25 r45 top value=1nF (schematic designator C45)
C46_S1 "CAP 0402 1nF X7R" WCAP-CSGP_0402_L1W0.5H0.5 73.927,39.427 r225 top value=1nF (schematic designator C46)
C46_S2 "CAP 0402 1nF X7R" WCAP-CSGP_0402_L1W0.5H0.5 200,41.5 r45 top value=1nF (schematic designator C46)
C47_S1 "CAP 0603 100nF X7R" WCAP-CSGP_0603_L1.6W0.8H0.8_Reflow 101.25,27.5 r225 top value=100nF (schematic designator C47)
C47_S2 "CAP 0603 100nF X7R" WCAP-CSGP_0603_L1.6W0.8H0.8_Reflow 225.5,28.25 r225 top value=100nF (schematic designator C47)
C48_S1 "CAP 0603 47nF X7R" WCAP-CSGP_0603_L1.6W0.8H0.8_Reflow 28,65.75 r90 top value=47nF (schematic designator C48)
C48_S2 "CAP 0603 47nF X7R" WCAP-CSGP_0603_L1.6W0.8H0.8_Reflow 282,65.75 r90 top value=47nF (schematic designator C48)
C49_S1 "CAP 0603 100nF X7R" WCAP-CSGP_0603_L1.6W0.8H0.8_Reflow 103.5,29.75 r225 top value=100nF (schematic designator C49)
C49_S2 "CAP 0603 100nF X7R" WCAP-CSGP_0603_L1.6W0.8H0.8_Reflow 227.75,30.5 r225 top value=100nF (schematic designator C49)
C50_S1 "CAP 0402 10nF X7R" WCAP-CSGP_0402_L1W0.5H0.5 102.5,32 r225 top value=10nF (schematic designator C50)
C50_S2 "CAP 0402 10nF X7R" WCAP-CSGP_0402_L1W0.5H0.5 226.75,32.75 r225 top value=10nF (schematic designator C50)
C51_S1 "CAP 0603 47nF X7R" WCAP-CSGP_0603_L1.6W0.8H0.8_Reflow 30.5,65.75 r90 top value=47nF (schematic designator C51)
C51_S2 "CAP 0603 47nF X7R" WCAP-CSGP_0603_L1.6W0.8H0.8_Reflow 284.5,65.75 r90 top value=47nF (schematic designator C51)
C52_S1 "CAP 0603 100nF X7R" WCAP-CSGP_0603_L1.6W0.8H0.8_Reflow 105.75,32 r225 top value=100nF (schematic designator C52)
C52_S2 "CAP 0603 100nF X7R" WCAP-CSGP_0603_L1.6W0.8H0.8_Reflow 230,32.75 r225 top value=100nF (schematic designator C52)
C53_S1 "CAP 0402 10nF X7R" WCAP-CSGP_0402_L1W0.5H0.5 103.25,37.5 r315 top value=10nF (schematic designator C53)
C53_S2 "CAP 0402 10nF X7R" WCAP-CSGP_0402_L1W0.5H0.5 226,38.25 r315 top value=10nF (schematic designator C53)
C54_S1 "CAP 0603 47nF X7R" WCAP-CSGP_0603_L1.6W0.8H0.8_Reflow 33,65.75 r90 top value=47nF (schematic designator C54)
C54_S2 "CAP 0603 47nF X7R" WCAP-CSGP_0603_L1.6W0.8H0.8_Reflow 287,65.75 r90 top value=47nF (schematic designator C54)
C55_S1 "CAP 0603 100nF X7R" WCAP-CSGP_0603_L1.6W0.8H0.8_Reflow 103.28,40.72 r315 top value=100nF (schematic designator C55)
C55_S2 "CAP 0603 100nF X7R" WCAP-CSGP_0603_L1.6W0.8H0.8_Reflow 226,41.5 r315 top value=100nF (schematic designator C55)
C56_S1 "CAP 0402 10nF X7R" WCAP-CSGP_0402_L1W0.5H0.5 101.03,39.72 r315 top value=10nF (schematic designator C56)
C56_S2 "CAP 0402 10nF X7R" WCAP-CSGP_0402_L1W0.5H0.5 223.75,40.5 r315 top value=10nF (schematic designator C56)
C57_S1 "CAP 0603 47nF X7R" WCAP-CSGP_0603_L1.6W0.8H0.8_Reflow 35.5,65.75 r90 top value=47nF (schematic designator C57)
C57_S2 "CAP 0603 47nF X7R" WCAP-CSGP_0603_L1.6W0.8H0.8_Reflow 289.5,65.75 r90 top value=47nF (schematic designator C57)
C58_S1 "CAP 0603 100nF X7R" WCAP-CSGP_0603_L1.6W0.8H0.8_Reflow 101.03,42.97 r315 top value=100nF (schematic designator C58)
C58_S2 "CAP 0603 100nF X7R" WCAP-CSGP_0603_L1.6W0.8H0.8_Reflow 223.75,43.75 r315 top value=100nF (schematic designator C58)
C59_S1 "CAP 0402 10nF X7R" WCAP-CSGP_0402_L1W0.5H0.5 98.78,41.97 r315 top value=10nF (schematic designator C59)
C59_S2 "CAP 0402 10nF X7R" WCAP-CSGP_0402_L1W0.5H0.5 221.5,42.75 r315 top value=10nF (schematic designator C59)
C60_S1 "CAP 0603 47nF X7R" WCAP-CSGP_0603_L1.6W0.8H0.8_Reflow 6.25,63.25 r180 bottom value=47nF (schematic designator C60)
C60_S2 "CAP 0603 47nF X7R" WCAP-CSGP_0603_L1.6W0.8H0.8_Reflow 256.75,72.5 r0 bottom value=47nF (schematic designator C60)
C61_S1 "CAP 0402 10nF X7R" WCAP-CSGP_0402_L1W0.5H0.5 96.5,44.25 r315 top value=10nF (schematic designator C61)
C61_S2 "CAP 0402 10nF X7R" WCAP-CSGP_0402_L1W0.5H0.5 219.25,45 r315 top value=10nF (schematic designator C61)
C62_S1 "CAP 0603 47nF X7R" WCAP-CSGP_0603_L1.6W0.8H0.8_Reflow 38,65.75 r90 top value=47nF (schematic designator C62)
C62_S2 "CAP 0603 47nF X7R" WCAP-CSGP_0603_L1.6W0.8H0.8_Reflow 292,65.75 r90 top value=47nF (schematic designator C62)
C63_S1 "CAP 0603 100nF X7R" WCAP-CSGP_0603_L1.6W0.8H0.8_Reflow 98.75,45.25 r315 top value=100nF (schematic designator C63)
C63_S2 "CAP 0603 100nF X7R" WCAP-CSGP_0603_L1.6W0.8H0.8_Reflow 221.5,46 r315 top value=100nF (schematic designator C63)
C64 "CAP 0603 47nF X7R" WCAP-CSGP_0603_L1.6W0.8H0.8_Reflow 62.75,36 r270 top value=47nF
C65 "CAP 0603 47nF X7R" WCAP-CSGP_0603_L1.6W0.8H0.8_Reflow 71.85,34.9 r270 top value=47nF
C66 "CAP 0805 10uF X7R" WCAP-CSGP_0805_L2W1.25H0.6_Reflow 69.5,34.25 r90 top value=10uF
C67 "CAP 0603 47nF X7R" WCAP-CSGP_0603_L1.6W0.8H0.8_Reflow 62.75,32.5 r90 top value=47nF
C68 "CAP 0603 47nF X7R" WCAP-CSGP_0603_L1.6W0.8H0.8_Reflow 71.85,31.9 r90 top value=47nF
C69 "CAP 0402 220pF X7R" WCAP-CSGP_0402_L1W0.5H0.5 89.017,43.528 r180 top value=220pF
C70 "CAP 0402 220pF X7R" WCAP-CSGP_0402_L1W0.5H0.5 87.017,43.528 r0 top value=220pF
C71 "CAP 0402 10nF X7R" WCAP-CSGP_0402_L1W0.5H0.5 26.5,40 r180 top value=10nF
C72 "CAP 0402 10nF X7R" WCAP-CSGP_0402_L1W0.5H0.5 142.5,44.5 r270 top value=10nF
C73 "CAP 0402 220pF X7R" WCAP-CSGP_0402_L1W0.5H0.5 93.25,44.75 r135 top value=220pF
C74 "CAP 0402 220pF X7R" WCAP-CSGP_0402_L1W0.5H0.5 91.836,46.164 r135 top value=220pF
C75 "CAP 0402 220pF X7R" WCAP-CSGP_0402_L1W0.5H0.5 211,43.25 r0 top value=220pF
C76 "CAP 0402 220pF X7R" WCAP-CSGP_0402_L1W0.5H0.5 212.75,43.25 r180 top value=220pF
C77 "CAP 0402 10nF X7R" WCAP-CSGP_0402_L1W0.5H0.5 157.5,44.5 r90 top value=10nF
C78 "CAP 0402 220pF X7R" WCAP-CSGP_0402_L1W0.5H0.5 215.95,44.25 r180 top value=220pF
C79 "CAP 0402 220pF X7R" WCAP-CSGP_0402_L1W0.5H0.5 214.2,44.25 r0 top value=220pF
C80 "CAP 0402 10nF X7R" WCAP-CSGP_0402_L1W0.5H0.5 273.25,40 r0 top value=10nF
D1_S1 "MMSZ5260BT1G" ONSC-SOD-123-2-425-04_V 23,63.75 r270 bottom (schematic designator D1)
D1_S2 "MMSZ5260BT1G" ONSC-SOD-123-2-425-04_V 267.75,74 r270 bottom (schematic designator D1)
D2_S1 "MMSZ5237BT1G" ONSC-SOD-123-2-425-04_V 17,63.75 r270 bottom (schematic designator D2)
D2_S2 "MMSZ5237BT1G" ONSC-SOD-123-2-425-04_V 191,69.25 r180 bottom (schematic designator D2)
D3_S1 "MMSZ5250BT1G" ONSC-SOD-123-2-425-04_V 63.47,35.97 r225 bottom (schematic designator D3)
D3_S2 "MMSZ5250BT1G" ONSC-SOD-123-2-425-04_V 191,59.5 r180 bottom (schematic designator D3)
D4_S1 "MMSZ5267BT1G" ONSC-SOD-123-2-425-04_V 11,63.75 r270 bottom (schematic designator D4)
D4_S2 "MMSZ5267BT1G" ONSC-SOD-123-2-425-04_V 254,74 r270 bottom (schematic designator D4)
D5_S1 "MMSZ5255BT1G" ONSC-SOD-123-2-425-04_V 20,63.75 r270 bottom (schematic designator D5)
D5_S2 "MMSZ5255BT1G" ONSC-SOD-123-2-425-04_V 263.75,74 r270 bottom (schematic designator D5)
D6_S1 "MBR0520LT1G" ONSC-SOD-123-2-425-04_V 36,76.5 r270 bottom (schematic designator D6)
D6_S2 "MBR0520LT1G" ONSC-SOD-123-2-425-04_V 292,76.75 r270 bottom (schematic designator D6)
D7_S1 "MBR0520LT1G" ONSC-SOD-123-2-425-04_V 40,76.5 r90 bottom (schematic designator D7)
D7_S2 "MBR0520LT1G" ONSC-SOD-123-2-425-04_V 289.5,76.75 r90 bottom (schematic designator D7)
D8_S1 "MMSZ5237BT1G" ONSC-SOD-123-2-425-04_V 38.25,63.75 r0 bottom (schematic designator D8)
D8_S2 "MMSZ5237BT1G" ONSC-SOD-123-2-425-04_V 185.75,69.25 r180 bottom (schematic designator D8)
D9 "MMSZ4679T1G" ONSC-SOD-123-2-425-04_V 64.75,37 r90 top
D10 "MMSZ4679T1G" ONSC-SOD-123-2-425-04_V 64.75,41.75 r270 top
D11 "MMSZ4679T1G" ONSC-SOD-123-2-425-04_V 64.75,31.5 r270 top
D12 "MMSZ4679T1G" ONSC-SOD-123-2-425-04_V 64.75,26.75 r90 top
D13 "PESD5V0V1BB,115" PESD5V0V1BB115 27.5,36.25 r270 top
D14 "PESD5V0V1BB,115" PESD5V0V1BB115 27.5,33.75 r90 top
D15 "PESD5V0V1BB,115" PESD5V0V1BB115 272.758,36.2 r270 top
D16 "PESD5V0V1BB,115" PESD5V0V1BB115 272.758,33.8 r90 top
IC1_S1 "MC33771CTP1AE" QFP50P1200X1200X160-65N 88,35 r45 top locked (schematic designator IC1)
IC1_S2 "MC33771CTP1AE" QFP50P1200X1200X160-65N 212,35 r45 top locked (schematic designator IC1)
J1 "RJ-804-1-6" RJ80416 11.54,31.94 r270 top locked
J2 "RJ-804-1-6" RJ80416 288.5,38.99 r90 top locked
P1 "WF-1F254B2P" WF-1F254B2P 6.25,17.5 r270 top
P2 "WF-1F254B2P" WF-1F254B2P 135.5,74 r180 top locked
P3 "WF-1F254B15P" WF-1F254B15P 23,74 r180 top locked
P4 "WF-1F254B2P" WF-1F254B2P 122.75,74 r180 top locked
P5 "WF-1F254B2P" WF-1F254B2P 110,74 r180 top locked
P6 "WF-1F254B2P" WF-1F254B2P 97.25,74 r180 top locked
P7 "WF-1F254B2P" WF-1F254B2P 164.5,74 r180 top locked
P8 "WF-1F254B15P" WF-1F254B15P 277,74 r180 top locked
P9 "WF-1F254B2P" WF-1F254B2P 177.25,74 r180 top locked
P10 "WF-1F254B2P" WF-1F254B2P 190,74 r180 top locked
P11 "WF-1F254B2P" WF-1F254B2P 202.75,74 r180 top locked
P12 "WF-1F254B2P - DNP" WF-1F254B2P 84.5,74 r180 top locked
P13 "WF-1F254B2P - DNP" WF-1F254B2P 71.75,74 r180 top locked
P14 "WF-1F254B2P - DNP" WF-1F254B2P 59,74 r180 top locked
P15 "WF-1F254B2P - DNP" WF-1F254B2P 215.5,74 r180 top locked
P16 "WF-1F254B2P - DNP" WF-1F254B2P 228.25,74 r180 top locked
P17 "WF-1F254B2P - DNP" WF-1F254B2P 241,74 r180 top locked
R1_S1 "RES 0603 3kR 1%" RES_SM0603_YAGEORC_N 71.5,27.5 r225 top value=3kR (schematic designator R1)
R1_S2 "RES 0603 3kR 1%" RES_SM0603_YAGEORC_N 195,28 r225 top value=3kR (schematic designator R1)
R2_S1 "RES 0402 2kR 1%" FP0402 74.25,30.25 r225 top value=2kR (schematic designator R2)
R2_S2 "RES 0402 2kR 1%" FP0402 197.75,30.75 r225 top value=2kR (schematic designator R2)
R3_S1 "RES 0603 6.8kR 1%" RES_SM0603_YAGEORC_N 80.677,50.427 r45 top value=6.8kR (schematic designator R3)
R3_S2 "RES 0603 6.8kR 1%" RES_SM0603_YAGEORC_N 206.25,52.75 r225 top value=6.8kR (schematic designator R3)
R4_S1 "RES 0603 2R 1%" RES_SM0603_YAGEORC_N 13,57.75 r90 bottom value=2R (schematic designator R4)
R4_S2 "RES 0603 2R 1%" RES_SM0603_YAGEORC_N 263.75,63 r0 bottom value=2R (schematic designator R4)
R5_S1 "RES 0402 3.3kR 1%" FP0402 79.927,48.427 r135 top value=3.3kR (schematic designator R5)
R5_S2 "RES 0402 3.3kR 1%" FP0402 208.25,53.5 r135 top value=3.3kR (schematic designator R5)
R6_S1 "RES 0402 3.3kR 1%" FP0402 81.427,46.927 r135 top value=3.3kR (schematic designator R6)
R6_S2 "RES 0402 3.3kR 1%" FP0402 209.75,52 r135 top value=3.3kR (schematic designator R6)
R7_S1 "RES 0603 3kR 1%" RES_SM0603_YAGEORC_N 73.75,25.25 r225 top value=3kR (schematic designator R7)
R7_S2 "RES 0603 3kR 1%" RES_SM0603_YAGEORC_N 197.25,25.75 r225 top value=3kR (schematic designator R7)
R8_S1 "RES 0402 2kR 1%" FP0402 76.5,28 r225 top value=2kR (schematic designator R8)
R8_S2 "RES 0402 2kR 1%" FP0402 200,28.5 r225 top value=2kR (schematic designator R8)
R9_S1 "RES 0603 3kR 1%" RES_SM0603_YAGEORC_N 76,23 r225 top value=3kR (schematic designator R9)
R9_S2 "RES 0603 3kR 1%" RES_SM0603_YAGEORC_N 199.5,23.5 r225 top value=3kR (schematic designator R9)
R10_S1 "RES 0402 2kR 1%" FP0402 78.75,25.75 r225 top value=2kR (schematic designator R10)
R10_S2 "RES 0402 2kR 1%" FP0402 202.25,26.25 r225 top value=2kR (schematic designator R10)
R11_S1 "RES 0603 2R 1%" RES_SM0603_YAGEORC_N 15.75,57.75 r270 bottom value=2R (schematic designator R11)
R11_S2 "RES 0603 2R 1%" RES_SM0603_YAGEORC_N 268.75,63 r180 bottom value=2R (schematic designator R11)
R12_S1 "RES 0603 6.8kR 1%" RES_SM0603_YAGEORC_N 77.677,47.677 r45 top value=6.8kR (schematic designator R12)
R12_S2 "RES 0603 6.8kR 1%" RES_SM0603_YAGEORC_N 203.25,49.75 r225 top value=6.8kR (schematic designator R12)
R13_S1 "RES 0603 3kR 1%" RES_SM0603_YAGEORC_N 78.25,20.75 r225 top value=3kR (schematic designator R13)
R13_S2 "RES 0603 3kR 1%" RES_SM0603_YAGEORC_N 201.75,21.25 r225 top value=3kR (schematic designator R13)
R14_S1 "RES 0402 2kR 1%" FP0402 81,23.5 r225 top value=2kR (schematic designator R14)
R14_S2 "RES 0402 2kR 1%" FP0402 204.5,24 r225 top value=2kR (schematic designator R14)
R15_S1 "RES 0402 3.3kR 1%" FP0402 76.927,45.677 r135 top value=3.3kR (schematic designator R15)
R15_S2 "RES 0402 3.3kR 1%" FP0402 205.25,50.5 r135 top value=3.3kR (schematic designator R15)
R16_S1 "RES 0402 3.3kR 1%" FP0402 78.427,44.177 r135 top value=3.3kR (schematic designator R16)
R16_S2 "RES 0402 3.3kR 1%" FP0402 206.75,49 r135 top value=3.3kR (schematic designator R16)
R17_S1 "RES 0603 3kR 1%" RES_SM0603_YAGEORC_N 80.5,18.5 r225 top value=3kR (schematic designator R17)
R17_S2 "RES 0603 3kR 1%" RES_SM0603_YAGEORC_N 204,19 r225 top value=3kR (schematic designator R17)
R18_S1 "RES 0402 2kR 1%" FP0402 83.25,21.25 r225 top value=2kR (schematic designator R18)
R18_S2 "RES 0402 2kR 1%" FP0402 206.75,21.75 r225 top value=2kR (schematic designator R18)
R19_S1 "RES 0603 2R 1%" RES_SM0603_YAGEORC_N 20.25,57.75 r90 bottom value=2R (schematic designator R19)
R19_S2 "RES 0603 2R 1%" RES_SM0603_YAGEORC_N 274.5,57.75 r90 bottom value=2R (schematic designator R19)
R20_S1 "RES 0603 3kR 1%" RES_SM0603_YAGEORC_N 93.25,16.5 r315 top value=3kR (schematic designator R20)
R20_S2 "RES 0603 3kR 1%" RES_SM0603_YAGEORC_N 217.5,17.25 r315 top value=3kR (schematic designator R20)
R21_S1 "RES 0402 2kR 1%" FP0402 90.5,19.25 r315 top value=2kR (schematic designator R21)
R21_S2 "RES 0402 2kR 1%" FP0402 214.75,20 r315 top value=2kR (schematic designator R21)
R22_S1 "RES 0603 6.8kR 1%" RES_SM0603_YAGEORC_N 74.677,44.927 r45 top value=6.8kR (schematic designator R22)
R22_S2 "RES 0603 6.8kR 1%" RES_SM0603_YAGEORC_N 200.25,46.75 r225 top value=6.8kR (schematic designator R22)
R23_S1 "RES 0402 3.3kR 1%" FP0402 73.927,42.927 r135 top value=3.3kR (schematic designator R23)
R23_S2 "RES 0402 3.3kR 1%" FP0402 202.25,47.5 r135 top value=3.3kR (schematic designator R23)
R24_S1 "RES 0402 3.3kR 1%" FP0402 75.427,41.427 r135 top value=3.3kR (schematic designator R24)
R24_S2 "RES 0402 3.3kR 1%" FP0402 203.75,46 r135 top value=3.3kR (schematic designator R24)
R25_S1 "RES 0603 3kR 1%" RES_SM0603_YAGEORC_N 95.5,18.75 r315 top value=3kR (schematic designator R25)
R25_S2 "RES 0603 3kR 1%" RES_SM0603_YAGEORC_N 219.75,19.5 r315 top value=3kR (schematic designator R25)
R26_S1 "RES 0402 2kR 1%" FP0402 92.75,21.5 r315 top value=2kR (schematic designator R26)
R26_S2 "RES 0402 2kR 1%" FP0402 217,22.25 r315 top value=2kR (schematic designator R26)
R27_S1 "RES 0603 2R 1%" RES_SM0603_YAGEORC_N 25.5,57.75 r90 bottom value=2R (schematic designator R27)
R27_S2 "RES 0603 2R 1%" RES_SM0603_YAGEORC_N 279.5,55.751 r90 bottom value=2R (schematic designator R27)
R28_S1 "RES 0603 3kR 1%" RES_SM0603_YAGEORC_N 97.75,21 r315 top value=3kR (schematic designator R28)
R28_S2 "RES 0603 3kR 1%" RES_SM0603_YAGEORC_N 222,21.75 r315 top value=3kR (schematic designator R28)
R29_S1 "RES 0402 2kR 1%" FP0402 95,23.75 r315 top value=2kR (schematic designator R29)
R29_S2 "RES 0402 2kR 1%" FP0402 219.25,24.5 r315 top value=2kR (schematic designator R29)
R30_S1 "RES 0603 6.8kR 1%" RES_SM0603_YAGEORC_N 71.677,42.177 r45 top value=6.8kR (schematic designator R30)
R30_S2 "RES 0603 6.8kR 1%" RES_SM0603_YAGEORC_N 197.25,43.75 r225 top value=6.8kR (schematic designator R30)
R31_S1 "RES 0402 3.3kR 1%" FP0402 70.927,40.177 r135 top value=3.3kR (schematic designator R31)
R31_S2 "RES 0402 3.3kR 1%" FP0402 199.25,44.5 r135 top value=3.3kR (schematic designator R31)
R32_S1 "RES 0402 3.3kR 1%" FP0402 72.427,38.677 r135 top value=3.3kR (schematic designator R32)
R32_S2 "RES 0402 3.3kR 1%" FP0402 200.75,43 r135 top value=3.3kR (schematic designator R32)
R33_S1 "RES 0603 3kR 1%" RES_SM0603_YAGEORC_N 100,23.25 r315 top value=3kR (schematic designator R33)
R33_S2 "RES 0603 3kR 1%" RES_SM0603_YAGEORC_N 224.25,24 r315 top value=3kR (schematic designator R33)
R34_S1 "RES 0402 2kR 1%" FP0402 97.25,26 r315 top value=2kR (schematic designator R34)
R34_S2 "RES 0402 2kR 1%" FP0402 221.5,26.75 r315 top value=2kR (schematic designator R34)
R35_S1 "RES 0603 2R 1%" RES_SM0603_YAGEORC_N 27.75,57.75 r90 bottom value=2R (schematic designator R35)
R35_S2 "RES 0603 2R 1%" RES_SM0603_YAGEORC_N 282,55.75 r90 bottom value=2R (schematic designator R35)
R36_S1 "RES 0603 3kR 1%" RES_SM0603_YAGEORC_N 102.25,25.5 r315 top value=3kR (schematic designator R36)
R36_S2 "RES 0603 3kR 1%" RES_SM0603_YAGEORC_N 226.5,26.25 r315 top value=3kR (schematic designator R36)
R37_S1 "RES 0402 2kR 1%" FP0402 99.5,28.25 r315 top value=2kR (schematic designator R37)
R37_S2 "RES 0402 2kR 1%" FP0402 223.75,29 r315 top value=2kR (schematic designator R37)
R38_S1 "RES 0603 3kR 1%" RES_SM0603_YAGEORC_N 104.5,27.75 r315 top value=3kR (schematic designator R38)
R38_S2 "RES 0603 3kR 1%" RES_SM0603_YAGEORC_N 228.75,28.5 r315 top value=3kR (schematic designator R38)
R39_S1 "RES 0402 2kR 1%" FP0402 101.75,30.5 r315 top value=2kR (schematic designator R39)
R39_S2 "RES 0402 2kR 1%" FP0402 226,31.25 r315 top value=2kR (schematic designator R39)
R40_S1 "RES 0603 2R 1%" RES_SM0603_YAGEORC_N 30,57.75 r90 bottom value=2R (schematic designator R40)